# Altium PCB TMP-1-A.PcbDoc
Units mm, origin at the board's own origin, x right, y up, seen from the top; angles counter-clockwise.
Board outline 34 x 25 mm, 2 copper layers (Top Layer, Bottom Layer); 20 components, 9 nets, 43 pads, 18 vias.
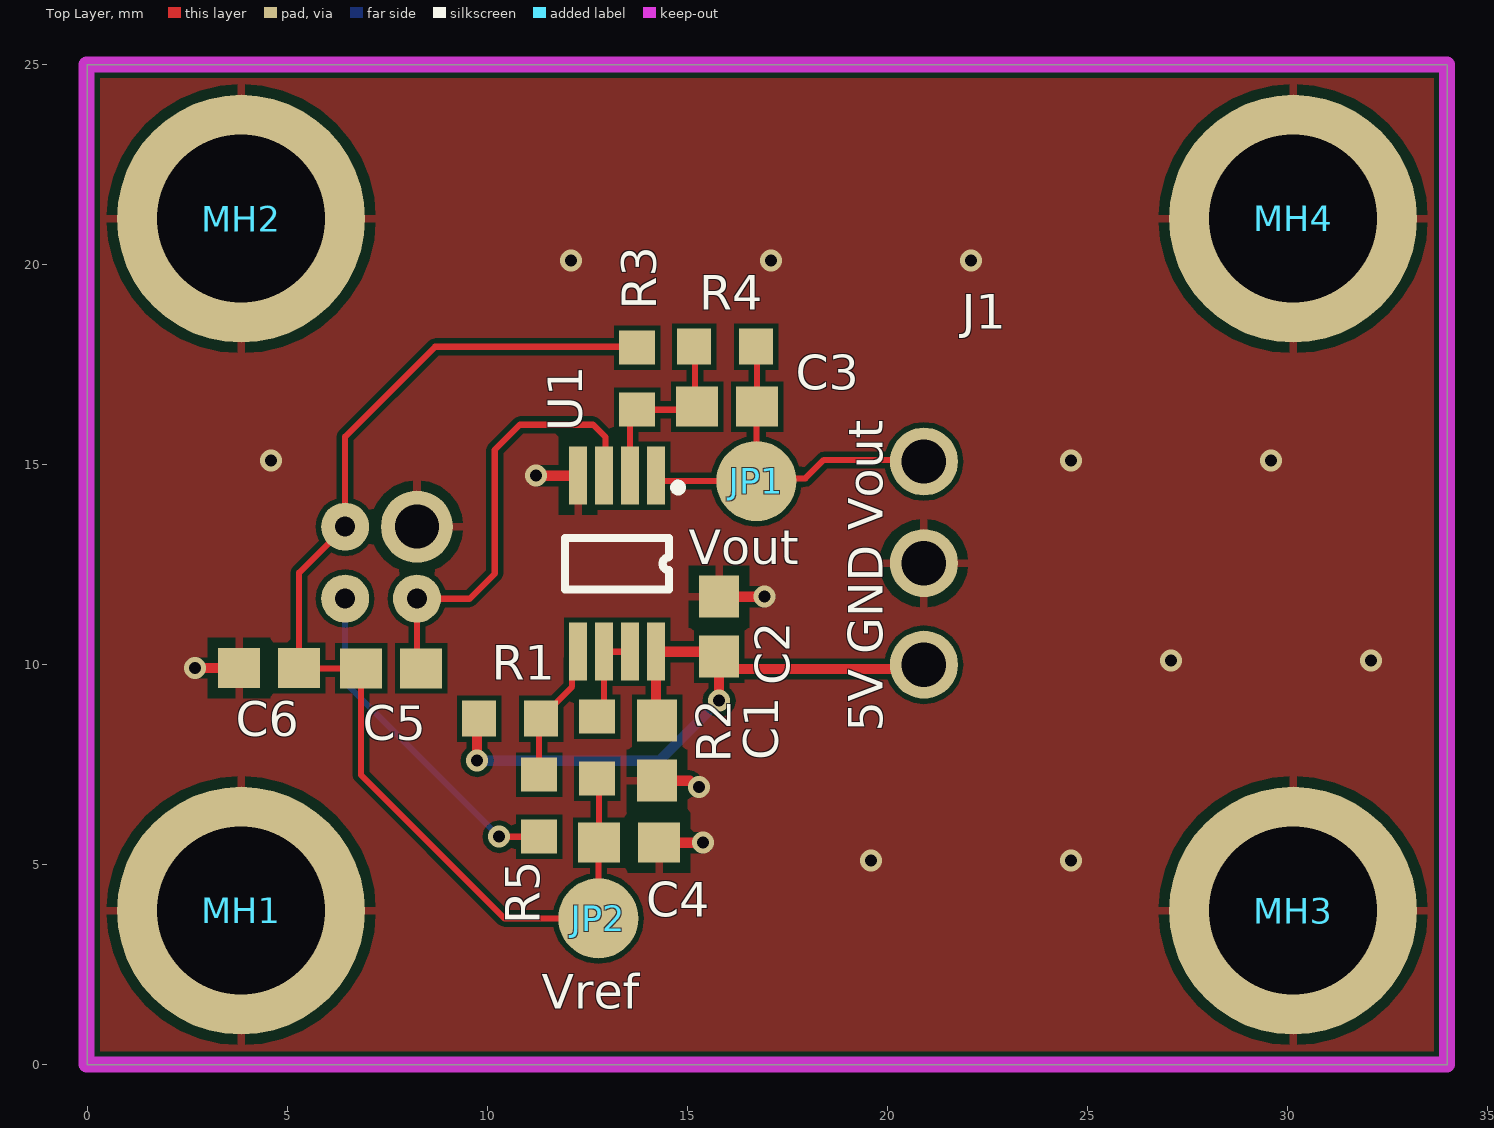
[diagram p0: Top Layer view]
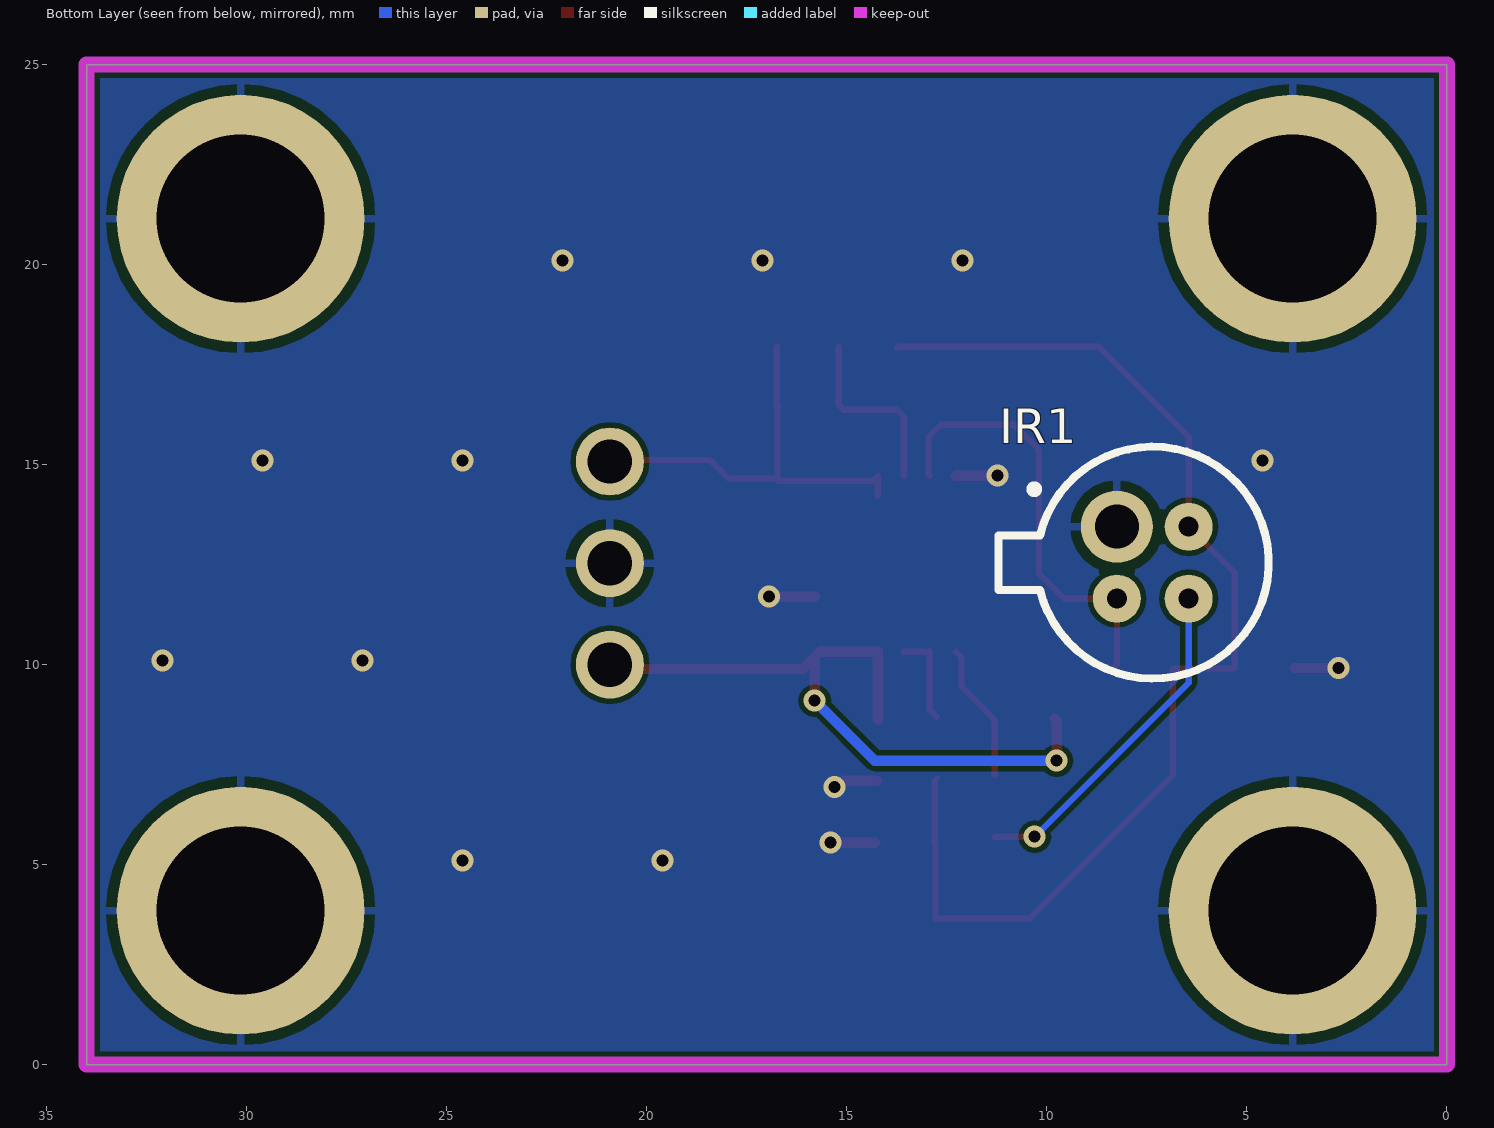
[diagram p1: Bottom Layer view, seen from below]
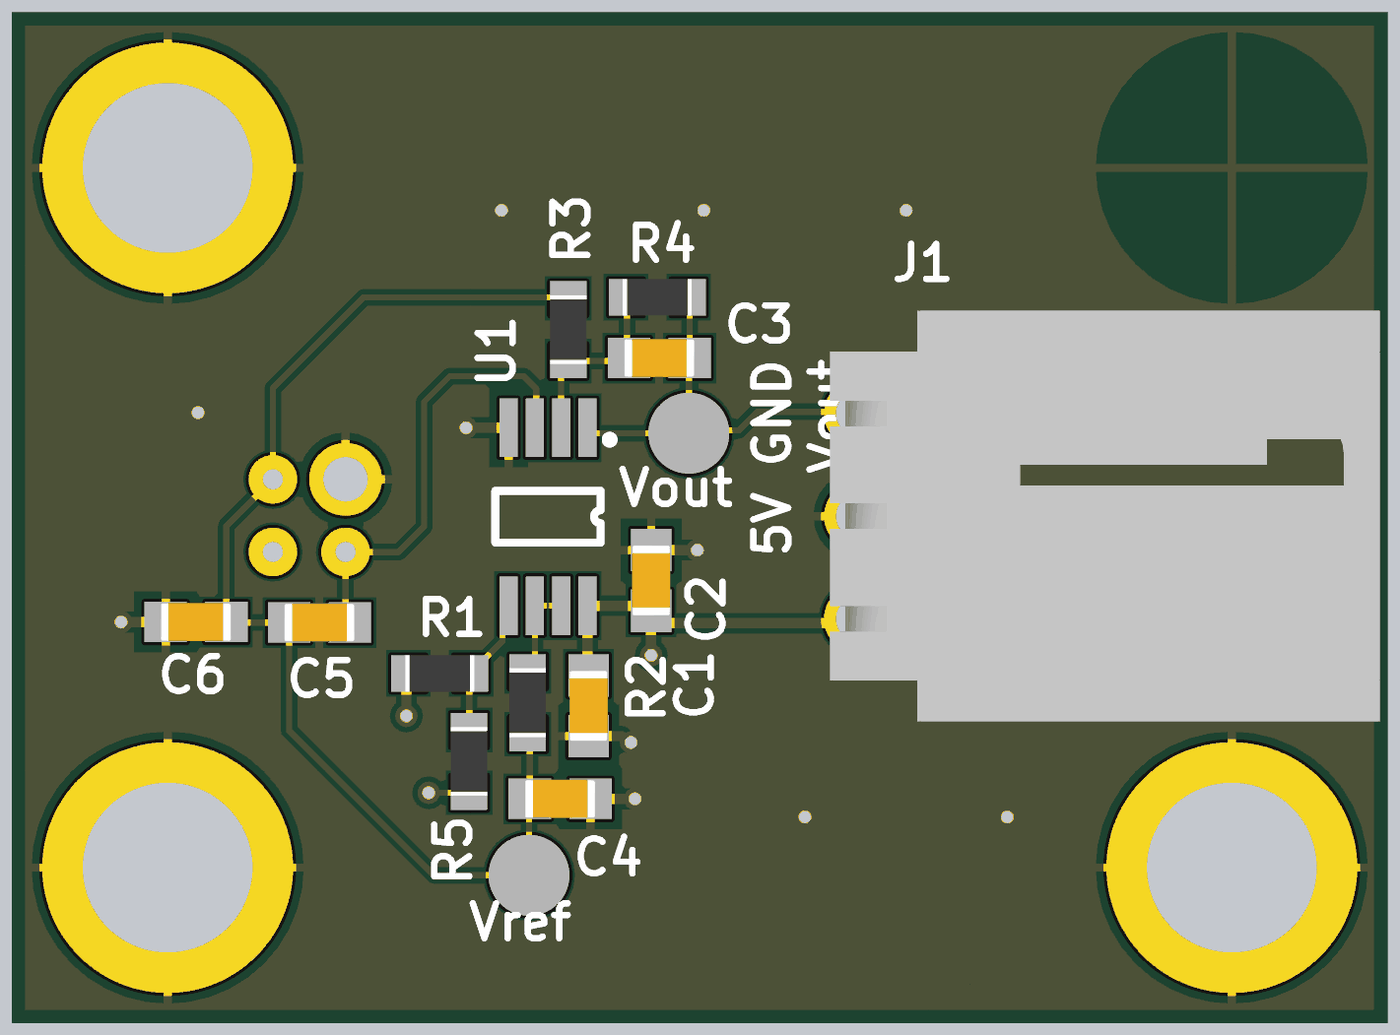
[diagram p2: 3D render of the assembled board from above, using the file's embedded part models]

## Layer stack, top to bottom
Top Solder: solder mask 0.0102, Solder Resist, Dk 3.5
Top Layer: signal copper 0.0356
Dielectric 1: dielectric 0.32, FR-4, Dk 4.8
Bottom Layer: signal copper 0.0356
Bottom Solder: solder mask 0.0102, Solder Resist, Dk 3.5

## Board outline
0,0 34,0 34,25 0,25

## Design rules (kind name [scope] priority, off if disabled: settings)
BoardOutlineClearance [All] p1: gap=0.2 ignorepadtopadclearanceinfootprint=FALSE
Clearance "Stitching HV_GND" [IsStitchingVia and InNet('HV_GND') vs (IsVia and (Not IsStitchingVia)) Or IsPad] p1: gap=0.127 ignorepadtopadclearanceinfootprint=FALSE
Clearance [All] p2: gap=0.127 ignorepadtopadclearanceinfootprint=TRUE except(0.2: Arc-SMDPad Track-SMDPad; 0.25: SMDPad-Hole THPad-Hole Via-Hole Fill-Hole Poly-Hole Region-Hole Text-Hole; 0.254: Arc-Via Arc-Hole Track-Via Track-Hole Via-Via; 0.33: Arc-THPad Track-THPad; 0.5: THPad-THPad; 0.54: SMDPad-THPad)
ComponentClearance [All] p1: gap=0.127 collisioncheckmode=3 verticalgap=0.127 showdistances=TRUE
DiffPairsRouting [All] p1: maxlimit=0.254 minlimit=0.127 mostfreqgap=0.127 toplayer_minwidth=0.127 toplayer_maxwidth=25.4 toplayer_prefwidth=0.127 bottomlayer_minwidth=0.127 bottomlayer_maxwidth=25.4 bottomlayer_prefwidth=0.127 maxuncoupledlength=12.7
Height [All] p1: minheight=0 maxheight=1816.048 prefheight=12.7
HoleSize [All] p1: absolutevalues=TRUE maxlimit=6.3 minlimit=0.3 maxpercent=80.000 minpercent=20.000
HoleToHoleClearance [All] p1: gap=0.25 allowstackedmicrovias=FALSE
MinimumAnnularRing [All] p1: minimumring=0.076
MinimumSolderMaskSliver [All] p1: minsoldermaskwidth=0
PlaneClearance [All] p1: clearance=0.127
PlaneConnect PlaneConnectPowerPads [InPadClass('PowerPads')] p1: planeconnectstyle=Direct reliefexpansion=0.508 reliefentries=4 reliefconductorwidth=0.254 reliefairgap=0.254
PlaneConnect [All] p2: pad.planeconnectstyle=Relief pad.reliefexpansion=0.3 pad.reliefentries=4 pad.reliefconductorwidth=0.254 pad.reliefairgap=0.127 via.planeconnectstyle=Direct via.reliefexpansion=0.3 via.reliefentries=4 via.reliefconductorwidth=0.127 via.reliefairgap=0.127
PolygonConnect PolygonConnectPowerPads [All vs (InPadClass('PowerPads'))] p1: connectstyle=Direct reliefconductorwidth=0.254 reliefentries=4 polygonreliefangle="90 Angle" airgapwidth=0.254
PolygonConnect [All] p2: thpad.connectstyle=Relief thpad.reliefconductorwidth=0.203 thpad.reliefentries=4 thpad.polygonreliefangle="90 Angle" thpad.airgapwidth=0.254 smdpad.connectstyle=Relief smdpad.reliefconductorwidth=0.203 smdpad.reliefentries=4 smdpad.polygonreliefangle="90 Angle" smdpad.airgapwidth=0.254 via.connectstyle=Direct via.reliefconductorwidth=0.203 via.reliefentries=4 via.polygonreliefangle="90 Angle" via.airgapwidth=0.254
RoutingVias [All] p1: holewidth=0.3 width=0.55 viastyle="Through Hole" minholewidth=0.2 minwidth=0.45 maxholewidth=0.6 maxwidth=6.6
SilkToSilkClearance [All] p1: silktosilkclearance=0
SilkToSolderMaskClearance [IsPad] p1: minsilkscreentomaskgap=0 clearancetoexposedcopper=TRUE
SolderMaskExpansion SolderMaskExpansion_Via [IsVia] p1: expansion=0.102 istentingtop=TRUE
SolderMaskExpansion [All] p2: expansion=0.075 istentingtop=FALSE
Width [All] p1: maxlimit=25.4 minlimit=0.13 preferedwidth=0.152 minimp=50.000000 maximp=50.000000 favimp=50.000000
20 further rules are at their usual default settings.

## Components (designator, comment, footprint, x,y, rotation, side; value= is the part's Value field where it differs from the comment)
C1 "0.1uF" CAP-0603 14.25,7.85 r90 top
C2 "1uF" CAP-0603 15.8,10.95 r270 top
C3 "1uF" CAP-0603 16,16.45 r180 top
C4 "0.1uF" CAP-0603 13.55,5.55 r180 top
C5 "1uF" CAP-0603 7.6,9.91 r0 top
C6 "1uF" CAP-0603 4.55,9.92 r0 top
IR1 "ZTP-148SRC1" ZTP-148SRC1 7.348,12.552 r0 bottom
J1 "WM4901-ND" 3PIN 20.92,10 r90 top
JP1 "Testpoint2" TP2 16.73,14.59 r0 top
JP2 "Testpoint2" TP2 12.78,3.66 r0 top
MH1 "MountingHole" MH4.2MM#1 3.85,4.35 r0 top
MH2 "MountingHole" MH4.2MM#2 5.35,20.65 r0 top
MH3 "MountingHole" MH4.2MM#3 30.4,1.46 r0 top
MH4 "MountingHole" MH4.2MM#4 46.09,5.22 r0 top
R1 "750k 1%" RES-0603 10.575,8.65 r180 top
R2 "100R 1%" RES-0603 12.75,7.925 r270 top
R3 "1K" RES-0603 13.75,17.15 r270 top
R4 "100K" RES-0603 15.95,17.95 r0 top
R5 "75k 1%" RES-0603 11.3,6.475 r90 top
U1 "TLV2333IDR" TSSOP65P505X110-8 13.25,12.525 r270 top

## Footprints (in the part's own frame and the unit in brackets; to place one, negate y for a bottom-side part, rotate by r counter-clockwise, add the part's x,y. Pads: shape width x height; smd on the part's side, far side on the other; paste and mask are expansions set on the pad)
3PIN [mm]
  round 1.7 hole 1.11: 1(0,0) 2(2.54,0) 3(5.08,0)
  body extent -2.54,-12.89 7.62,0.7, height 7.06
CAP-0603 [mm] "Chip Capacitor, 2-Leads, Body 1.60x0.80mm, IPC Medium Density"
  rect 1.05x1 smd: 1(-0.75,0) 2(0.75,0)
  body extent -0.87,-0.48 0.87,0.48, height 0.9
MH4.2MM#1 [mm] "Mounting Hole, 4.2mm"
  round 6.2 hole 4.2: 1(0,-0.5)
MH4.2MM#2 [mm] "Mounting Hole, 4.2mm"
  round 6.2 hole 4.2: 1(-1.5,0.5)
MH4.2MM#3 [mm] "Mounting Hole, 4.2mm"
  round 6.2 hole 4.2: 1(-0.25,2.39)
MH4.2MM#4 [mm] "Mounting Hole, 4.2mm"
  round 6.2 hole 4.2: 1(-15.94,15.93)
RES-0603 [mm] "Chip Resistor, 2-Leads, Body 1.60x0.80mm, IPC Medium Density"
  rect 0.85x0.9 smd: 1(-0.775,0) 2(0.775,0)
  body extent -0.85,-0.45 0.85,0.45, height 0.55
TP2 [mm]
  round 2 smd: 1(0,0)
TSSOP65P505X110-8 [mm] "VSSOP, 8-Leads, Body 3.1X3.1mm, Pitch 0.65mm, IPC Medium Density"
  rect 1.45x0.45 smd: 1(-2.2,0.975) 2(-2.2,0.325) 3(-2.2,-0.325) 4(-2.2,-0.975) 5(2.2,-0.975) 6(2.2,-0.325) 7(2.2,0.325) 8(2.2,0.975)
  silkscreen extent -2,-1.3 0.64,1.62, body extent -1.55,-1.55 1.55,1.55, height 0.95
ZTP-148SRC1 [mm] "IR Temperature Sensor"
  round 1.8 hole 1.1: 1(0.898,-0.898)
  round 1.2 hole 0.5: 2(-0.898,-0.898) 3(-0.898,0.898) 4(0.898,0.898)
  silkscreen extent -2.9,-2.9 3.86,2.9, body extent -2.7,-2.7 2.7,2.7, height 2.8

## Part data
C1 C4: library part 0603-0.1uF-16V, "CAP CER 0.1UF 16V X7R 0603", Capacitance=100nF, Case Code (Imperial)=0603, Case Code (Metric)=1608, Dielectric=X7R, Dielectric Material=Ceramic, Manufacturer=KEMET, Manufacturer Part Number=C0603C104M4RACTU, Max Operating Temperature=125°C, Min Operating Temperature=-55°C, Package Quantity=1, Supplier Part Number 1=399-1099-6-ND, Tolerance=20%, Voltage Rating=16V, Case/Package=0603, ComponentLink1Description=https://www.verical.com/server-webapp/html/getDatasheet?partID=66190&src-supplier=Verical, ComponentLink1URL=https://www.verical.com/server-webapp/html/getDatasheet?partID=66190&src-supplier=Verical, ComponentLink2Description=http://www.farnell.com/datasheets/2746055.pdf?src-supplier=Element14, ComponentLink2URL=http://www.farnell.com/datasheets/2746055.pdf?src-supplier=Element14, ComponentLink3Description=http://www.farnell.com/datasheets/2123765.pdf?src-supplier=Element14, ComponentLink3URL=http://www.farnell.com/datasheets/2123765.pdf?src-supplier=Element14, ComponentLink4Description=http://www.alliedelec.com/m/d/9bfe7773041ffe9d406e68bc7b377fdd.pdf?src-supplier=Allied+Electronics, ComponentLink4URL=http://www.alliedelec.com/m/d/9bfe7773041ffe9d406e68bc7b377fdd.pdf?src-supplier=Allied+Electronics, ComponentLink5Description=https://www.verical.com/server-webapp/html/getDatasheet?partID=302288&src-supplier=Verical, ComponentLink5URL=https://www.verical.com/server-webapp/html/getDatasheet?partID=302288&src-supplier=Verical, Depth=0.8mm, Height=0.8mm, Lead Pitch=0.7mm, Length=1.6mm, Mount="Surface Mount,PCB", Number of Pins=2, Packaging="Tape and Reel", Pricing 1="1=0.1, 10=0.036, 100=0.0161, 500=0.01152, 1000=0.00904 (USD)", Radiation Hardening=No, REACH SVHC="No SVHC", Stock 1=254524, Supplier 1=Digi-Key, Termination=SMD/SMT, Thickness=0.034inch, Voltage Rating (DC)=16V, Width=0.031inch
C2 C3 C5 C6: library part 0603-1uF-16V, "CAP CER 1UF 16V X7R 0603", Case Code (Imperial)=0603, Case Code (Metric)=1608, Dielectric=X7R, Dielectric Material=Ceramic, Manufacturer=KEMET, Manufacturer Part Number=C0603C105K4RACTU, Max Operating Temperature=125°C, Min Operating Temperature=-55°C, Package Quantity=4000, Supplier Part Number 1=399-7847-6-ND, Tolerance=10%, Voltage=16V, Capacitance=1uF, Case/Package=0603, ComponentLink1Description=http://www.mouser.com/ds/2/212/KEM_C1002_X7R_SMD-1102033.pdf?src-supplier=Mouser, ComponentLink1URL=http://www.mouser.com/ds/2/212/KEM_C1002_X7R_SMD-1102033.pdf?src-supplier=Mouser, ComponentLink2Description=http://www.kemet.com/kemet/web/homepage/kechome.nsf/file/Commercial%20Ceramic%20Chips%20X7R%20Dielectric/$file/KEM_C1002_X7R_SMD.pdf?src-supplier=Element14, ComponentLink2URL=http://www.kemet.com/kemet/web/homepage/kechome.nsf/file/Commercial%20Ceramic%20Chips%20X7R%20Dielectric/$file/KEM_C1002_X7R_SMD.pdf?src-supplier=Element14, ComponentLink3Description=https://www.verical.com/server-webapp/html/getDatasheet?partID=385479&src-supplier=Verical, ComponentLink3URL=https://www.verical.com/server-webapp/html/getDatasheet?partID=385479&src-supplier=Verical, ComponentLink4Description=http://www.kemet.com/kemet/web/homepage/kechome.nsf/vapubfiles/KEM_C1002_X7R_SMD.pdf/$file/KEM_C1002_X7R_SMD.pdf?src-supplier=Element14, ComponentLink4URL=http://www.kemet.com/kemet/web/homepage/kechome.nsf/vapubfiles/KEM_C1002_X7R_SMD.pdf/$file/KEM_C1002_X7R_SMD.pdf?src-supplier=Element14, Contact Plating=Tin,Matte, Depth=0.8mm, Dissipation Factor=3.5%, Height=0.8mm, Length=1.6mm, Mount="Surface Mount,PCB", Number of Pins=2, Packaging="Tape and Reel", Pricing 1="1=0.12, 10=0.088, 100=0.0391, 500=0.02792, 1000=0.02193 (USD)", Radiation Hardening=No, REACH SVHC="No SVHC", Stock 1=600463, Supplier 1=Digi-Key, Termination=SMD/SMT, Thickness=0.034inch, Voltage Rating=16V, Voltage Rating (DC)=16V, Width=0.031inch
IR1: library part IR_ZTP-148SRC1, "THERMOPILE IR SENSOR with thermistor", Manufacturer=Amphenol, Supplier Part Number 1=45-ZTP-148SRC1-ND, Manufacturer Part Number=ZTP-148SRC1, Pricing 1="1=3.10000, 10=2.80800, 25=2.51560, 50=2.22300, 100=2.16450, 500=1.81350, 1000=1.69650, 5000=1.57950 (USD)", RoHS=No, Stock 1=97895, Supplier 1=Digi-Key
J1: library part 3PIN, "CONN HEADER R/A 3POS 2.54MM", Color=Black, Contact Resistance=30mR, Current Rating=3A, Flammability Rating="UL94 V-0", Insulation Resistance=1GR, Manufacturer=Molex, Manufacturer Part Number=70553-0002, Max Operating Temperature=105°C, Min Operating Temperature=-40°C, Package Quantity=2080, Voltage Rating=250V, Approvals=UL,CSA, ComponentLink1Description=http://www.molex.com/webdocs/datasheets/pdf/en-us/0705530002_PCB_HEADERS.pdf?src-supplier=Avnet, ComponentLink1URL=http://www.molex.com/webdocs/datasheets/pdf/en-us/0705530002_PCB_HEADERS.pdf?src-supplier=Avnet, ComponentLink2Description=http://www.onlinecomponents.com/productFiles/mf-MOL/209530705530002_pcb_headers.pdf?src-supplier=Onlinecomponents.com, ComponentLink2URL=http://www.onlinecomponents.com/productFiles/mf-MOL/209530705530002_pcb_headers.pdf?src-supplier=Onlinecomponents.com, ComponentLink3Description=http://uk.rs-online.com/webdocs/1362/0900766b81362e0f.pdf?src-supplier=RSComponents, ComponentLink3URL=http://uk.rs-online.com/webdocs/1362/0900766b81362e0f.pdf?src-supplier=RSComponents, ComponentLink4Description=http://www.jameco.com/Jameco/Products/ProdDS/1933671.pdf?src-supplier=Jameco, ComponentLink4URL=http://www.jameco.com/Jameco/Products/ProdDS/1933671.pdf?src-supplier=Jameco, ComponentLink5Description=http://www.mouser.com/ds/2/276/0705530002_PCB_HEADERS-172778.pdf?src-supplier=Mouser, ComponentLink5URL=http://www.mouser.com/ds/2/276/0705530002_PCB_HEADERS-172778.pdf?src-supplier=Mouser, Contact Gender=Male, Contact Material="Bronze,Brass,Copper Alloy", Contact Plating=Gold, ELV=Compliant, Gender=Male, Glow Wire Compliant=Non-compliant, Housing Color=Black, Housing Material=Thermoplastic, Lead Free="Lead Free", Material=Brass, Mount="Through Hole", Number of Circuits=3, Number of Contacts=3, Number of Positions=3, Number of Rows=1, Orientation="Right Angle", Packaging=Rail/Tube, Pitch=2.54mm, Pricing 1="1=1.02, 10=0.893, 100=0.7702, 500=0.63018, 1000=0.56016, 5000=0.49014, 10000=0.46563 (USD)", Radiation Hardening=No, REACH SVHC=Unknown, Stock 1=2903, Supplier 1=Digi-Key, Supplier Part Number 1=WM4901-ND, Termination=Solder, Voltage Rating (DC)=250V
JP1 JP2: "Single layer pad TP"
MH1 MH2 MH3 MH4: library part MH4.2mm, "Mounting hole, 4.2mm", Case=TH
R1: library part 0603-750K, "RES SMD 750K OHM 1% 1/10W 0603", Case Code (Imperial)=0603, Case Code (Metric)=1608, Manufacturer="Stackpole Electronics", Manufacturer Part Number=RMCF0603FT750K, Max Operating Temperature=155°C, Max Power Dissipation=100mW, Min Operating Temperature=-55°C, Resistance=750kR, Resistor Type="Thick Film", Supplier Part Number 1=RMCF0603FT750KCT-ND, Temperature Coefficient=100ppm/°C, Tolerance=1%, Case/Package=0603, Category="Chip SMD Resistors", ComponentLink1Description=http://components.arrow.com/part/dataview/44988031S7440371N1174?src-supplier=Arrow+Electronics, ComponentLink1URL=http://components.arrow.com/part/dataview/44988031S7440371N1174?src-supplier=Arrow+Electronics, ComponentLink2Description=https://www.seielect.com/Catalog/SEI-RMCF_RMCP.pdf?src-supplier=Digi-Key, ComponentLink2URL=https://www.seielect.com/Catalog/SEI-RMCF_RMCP.pdf?src-supplier=Digi-Key, ComponentLink3Description=https://www.seielect.com/catalog/SEI-Packaging.pdf?src-supplier=Digi-Key, ComponentLink3URL=https://www.seielect.com/catalog/SEI-Packaging.pdf?src-supplier=Digi-Key, ComponentLink4Description=http://www.seielect.com/Catalog/SEI-RMC.pdf?src-supplier=Future+Electronics, ComponentLink4URL=http://www.seielect.com/Catalog/SEI-RMC.pdf?src-supplier=Future+Electronics, ComponentLink5Description=https://www.seielect.com/catalog/SEI-RMCF_RMCP.pdf?src-supplier=Avnet, ComponentLink5URL=https://www.seielect.com/catalog/SEI-RMCF_RMCP.pdf?src-supplier=Avnet, Contact Plating=Tin,Matte, Features="Automotive AEC-Q200", Height=0.022inch, Lead Free="Lead Free", Length=0.061inch, Manufacturer Product Number=RMCF0603FT750K, Mount="Surface Mount", Number of Terminations=2, Packaging="Tape and Reel", Power Rating=100mW, Pricing 1="1=0.10000, 10=0.01600, 100=0.00650, 1000=0.00292, 2500=0.00253 (USD)", Radiation Hardening=No, RoHS=Yes, RoHS Compliant=Yes, Series=RMCF, Size Code=0603, Stock 1=145363, Supplier 1=Digi-Key, Width=0.031inch
R2: library part 0603-100R, "RES 100 OHM 1% 1/8W 0603", Case Code (Imperial)=0603, Case Code (Metric)=1608, Manufacturer="Stackpole Electronics", Manufacturer Part Number=RNCP0603FTD100R, Max Operating Temperature=155°C, Max Power Dissipation=125mW, Min Operating Temperature=-55°C, Resistance=100R, Resistor Type="Thin Film", Supplier Part Number 1=RNCP0603FTD100RCT-ND, Temperature Coefficient=100ppm/°C, Tolerance=1%, Case/Package=0603, Category="Chip SMD Resistors", ComponentLink1Description=https://www.seielect.com/catalog/SEI-Packaging.pdf?src-supplier=Digi-Key, ComponentLink1URL=https://www.seielect.com/catalog/SEI-Packaging.pdf?src-supplier=Digi-Key, ComponentLink2Description=https://www.seielect.com/Catalog/SEI-rncp.pdf?src-supplier=Avnet, ComponentLink2URL=https://www.seielect.com/Catalog/SEI-rncp.pdf?src-supplier=Avnet, Contact Plating=Tin,Matte, Features="Moisture Resistant,Anti-Sulfur", Height=0.02inch, Lead Free="Lead Free", Length=0.059inch, Manufacturer Product Number=RNCP0603FTD100R, Mount="Surface Mount", Number of Terminations=2, Packaging="Tape and Reel", Pricing 1="1=0.10000, 10=0.05800, 100=0.02360, 1000=0.01060, 2500=0.00920 (USD)", Radiation Hardening=No, RoHS=Yes, RoHS Compliant=Yes, Series=RNCP, Stock 1=158067, Supplier 1=Digi-Key, Width=0.031inch
R3: library part 0603-1KR, "RES SMD 1K OHM 1% 1/10W 0603", Case Code (Imperial)=0603, Case Code (Metric)=1608, Manufacturer="Vishay Dale", Manufacturer Part Number=CRCW06031K00FKEA, Max Operating Temperature=155°C, Max Power Dissipation=100mW, Min Operating Temperature=-55°C, Package Quantity=10, Resistance=1kR, Supplier Part Number 1=541-1.00KHCT-ND, Temperature Coefficient=100ppm/°C, Tolerance=1%, Voltage Rating=75V, Case/Package=0603, ComponentLink1Description=http://www.vishay.com/docs/20035/dcrcwe3.pdf?src-supplier=Digi-Key, ComponentLink1URL=http://www.vishay.com/docs/20035/dcrcwe3.pdf?src-supplier=Digi-Key, ComponentLink2Description=http://uk.rs-online.com/webdocs/0d98/0900766b80d98afc.pdf?src-supplier=RSComponents, ComponentLink2URL=http://uk.rs-online.com/webdocs/0d98/0900766b80d98afc.pdf?src-supplier=RSComponents, ComponentLink3Description=http://www.vishay.com/docs/20035/dcrcwe3.pdf?src-supplier=Avnet, ComponentLink3URL=http://www.vishay.com/docs/20035/dcrcwe3.pdf?src-supplier=Avnet, ComponentLink4Description=http://www.vishay.com/docs/20035/dcrcwe3.pdf?src-supplier=Avnet+Asia, ComponentLink4URL=http://www.vishay.com/docs/20035/dcrcwe3.pdf?src-supplier=Avnet+Asia, ComponentLink5Description=http://www.farnell.com/datasheets/2310790.pdf?src-supplier=Element14, ComponentLink5URL=http://www.farnell.com/datasheets/2310790.pdf?src-supplier=Element14, ComponentLink6Description=https://www.distrelec.biz/Web/Downloads/a_/en/flD-CRCW-e3_data_en.pdf?mime=application%2Fpdf&src-supplier=Distrelec, ComponentLink6URL=https://www.distrelec.biz/Web/Downloads/a_/en/flD-CRCW-e3_data_en.pdf?mime=application%2Fpdf&src-supplier=Distrelec, ComponentLink7Description=http://www.vishay.com/docs/20035/dcrcwe3.pdf?src-supplier=Future+Electronics, ComponentLink7URL=http://www.vishay.com/docs/20035/dcrcwe3.pdf?src-supplier=Future+Electronics, ComponentLink8Description=http://www.vishay.com/docs/20035/dcrcwe3.pdf?src-supplier=Avnet+Europe, ComponentLink8URL=http://www.vishay.com/docs/20035/dcrcwe3.pdf?src-supplier=Avnet+Europe, Composition="Thick Film", Contact Plating=Tin, Depth=0.85mm, Features="Automotive AEC-Q200", Height=0.45mm, Lead Free="Lead Free", Length=1.55mm, Military Standard=Not, Mount="Surface Mount", Number of Pins=2, Number of Terminations=2, Packaging="Tape and Reel", Power Rating=100mW, Pricing 1="1=0.1, 10=0.034, 100=0.0139, 1000=0.00623, 2500=0.0054 (USD)", Radiation Hardening=No, REACH SVHC=Unknown, Stock 1=671453, Supplier 1=Digi-Key, Termination=SMD/SMT, Voltage Rating (DC)=75V, Weight=7.1E-05oz, Width=0.033inch
R4: library part 0603-100KR, "RES 100K OHM 1% 1/10W 0603", Case Code (Imperial)=0603, Case Code (Metric)=1608, Manufacturer="Stackpole Electronics", Manufacturer Part Number=RMCF0603FT100K, Max Operating Temperature=155°C, Max Power Dissipation=100mW, Min Operating Temperature=-55°C, Resistance=100kR, Supplier Part Number 1=RMCF0603FT100KDKR-ND, Temperature Coefficient=100ppm/°C, Tolerance=1%, Working Voltage=75V, Case/Package=0603, ComponentLink1Description=https://www.verical.com/server-webapp/html/getDatasheet?partID=362597&src-supplier=Verical, ComponentLink1URL=https://www.verical.com/server-webapp/html/getDatasheet?partID=362597&src-supplier=Verical, Composition="Thick Film", Contact Plating=Tin,Matte, Depth=0.8mm, Features="Automotive AEC-Q200", Height=0.022inch, Lead Free="Lead Free", Length=1.55mm, Military Standard=Not, Mount="Surface Mount", Number of Terminations=2, Packaging="Tape and Reel", Power Rating=100mW, Pricing 1="1=0.1, 10=0.016, 100=0.0065, 1000=0.00292, 2500=0.00253 (USD)", Radiation Hardening=No, Stock 1=1428218, Supplier 1=Digi-Key, Width=0.031inch
R5: library part 0603-75K, "75 kohm, 75 V, 0603 [1608 Metric], 100 mW,  1%", Case Code (Imperial)=0603, Case Code (Metric)=1608, Manufacturer="Vishay BCcomponents", Manufacturer Part Number=MCT06030C7502FP500, Max Operating Temperature=125°C, Max Power Dissipation=125mW, Min Operating Temperature=-55°C, Package Quantity=5000, Power Rating=100mW, Resistance=75kR, Resistance Tolerance=1%, Resistor Type="Thin Film", Supplier Part Number 1=749-1681-1-ND, Temperature Coefficient=50ppm/°C, Voltage Rating=75V, Case/Package=0603, Category="Chip SMD Resistors", ComponentLink1Description=https://datasheet.ciiva.com/2571/mc-pro-2571677.pdf?src-supplier=Digi-Key, ComponentLink1URL=https://datasheet.ciiva.com/2571/mc-pro-2571677.pdf?src-supplier=Digi-Key, ComponentLink2Description=https://datasheet.ciiva.com/16854/mc-pro-16854780.pdf?src-supplier=Avnet+Europe, ComponentLink2URL=https://datasheet.ciiva.com/16854/mc-pro-16854780.pdf?src-supplier=Avnet+Europe, Construction=Rectangular, Contact Plating=Tin, Depth=0.85mm, Height=0.022inch, Lead Free="Lead Free", Length=0.061inch, Manufacturer Product Number=MCT06030C7502FP500, Military Standard=Not, Mount="Surface Mount", Number of Terminations=2, Packaging="Tape and Reel", Pricing 1="1=0.13000, 10=0.12100, 100=0.04650, 1000=0.02046, 2500=0.01767 (USD)", Radiation Hardening=No, REACH SVHC=Unknown, RoHS=Yes, RoHS Compliant=Yes, Series="MCT 0603 - Professional", Stock 1=36307, Supplier 1=Digi-Key, Tolerance=1%, Voltage Rating (DC)=75V, Width=0.033inch
U1: library part IC_TLV2333, "IC OP AMP ZERO-DRIFT CMOS 8SOIC", Case/Package=SOIC, Input Bias Current=70pA, Input Offset Voltage (Vos)=2uV, Manufacturer="Texas Instruments", Max Operating Temperature=125°C, Min Operating Temperature=-40°C, Operating Supply Current=17uA, Output Current per Channel=5mA, Supplier Part Number 1=296-43772-1-ND, Category="Amplifiers - Op Amps, Buffer, Instrumentation", ComponentLink1Description=http://www.ti.com/lit/ds/symlink/tlv2333.pdf?src-supplier=Digi-Key, ComponentLink1URL=http://www.ti.com/lit/ds/symlink/tlv2333.pdf?src-supplier=Digi-Key, ComponentLink2Description=http://www.ti.com/lit/gpn/tlv2333?src-supplier=Mouser, ComponentLink2URL=http://www.ti.com/lit/gpn/tlv2333?src-supplier=Mouser, Gain Bandwidth Product=350kHz, Lead Free="Lead Free", Manufacturer Part Number=TLV2333IDR, Mount="Surface Mount", Number of Channels=2, Number of Circuits=2, Number of Pins=8, Packaging="Tape and Reel", Pricing 1="1=1.90000, 10=1.70500, 25=1.60840, 100=1.28680, 250=1.12600, 500=1.09382, 1000=0.86862 (USD)", RoHS=Yes, RoHS Compliant=Yes, Slew Rate=0.16V/µs, Stock 1=6297, Supplier 1=Digi-Key

## Via types
v1: diameter 0.55, hole 0.3, Top Layer to Bottom Layer, tented both sides, 18 vias

## Nets (pads, with @x,y where several pads share a name; then routed paths per layer and width w, separated by ;. In a path a pad name is that pad's centre, name@x,y a point inside that pad or via, vN(x,y) a via of type N, cw(c..) or ccw(c..) an arc to the next point about the centre after c; other vN are vias at no path point)
Buf_Out: R2.1 U1.6 U1.7 | length 2.3
  Top Layer w0.152: R2.1 12.925,8.875 U1.6 U1.7
D+5V: C1.2 C2.2 J1.1 R1.2 U1.8 | length 17.5
  Top Layer w0.152: C1.2@14.225,8.625 C1.2
  Top Layer w0.254: v1(9.75,7.6) 9.75,8.6 R1.2 ; C1.2@14.225,8.625 U1.8 15.675,10.325 C2.2 ; v1(15.8,9.1) C2.2 ; J1.1 20.81,9.89 16.11,9.89 C2.2
  Bottom Layer w0.254: v1(9.75,7.6) 14.3,7.6 v1(15.8,9.1)
GND: C1.1 C2.1 C4.1 C6.1 IR1.1 J1.2 MH1.1 MH2.1 MH3.1 MH4.1 U1.4 | length 5.5
  Top Layer w0.254: v1(2.7,9.92) C6.1 ; v1(11.225,14.725) U1.4 ; C1.1 15.064,7.1 15.22,6.944 v1(15.3,6.944) ; C4.1 v1(15.4,5.55) ; C2.1 v1(16.94,11.7)
  other v1: 19.6,5.1 24.6,5.1 27.1,10.1 32.1,10.1 4.6,15.1 24.6,15.1 29.6,15.1 12.1,20.1 17.1,20.1 22.1,20.1
NetC3_2: C3.2 R3.2 R4.1 U1.2 | length 4.7
  Top Layer w0.152: U1.2 13.575,16.2 R3.2 15.075,16.375 15.2,16.5 R4.1@15.2,17.95
NetIR1_3: IR1.3 R5.1 | length 8.5
  Top Layer w0.152: v1(10.3,5.7) R5.1
  Bottom Layer w0.152: IR1.3 6.45,9.55 v1(10.3,5.7)
NetR1_1: R1.1 R5.2 U1.5 | length 3.5
  Top Layer w0.152: R5.2 11.3,8.6 R1.1 11.35,8.675 12.126,9.451 12.126,10.176 U1.5
Vout: C3.1 J1.3 JP1.1 R4.2 U1.1 | length 10.9
  Top Layer w0.152: U1.1@14.225,14.225 U1.1 14.36,14.59 JP1.1 ; R4.2@16.75,17.95 C3.1 16.725,16.45 16.73,16.445 JP1.1 ; J1.3 20.88,15.12 18.42,15.12 17.959,14.659 16.799,14.659 JP1.1
Vref: C4.2 C5.1 C6.2 IR1.2 JP2.1 R2.2 R3.1 | length 29.7
  Top Layer w0.152: R2.2 12.8,7.1 C4.2 12.78,5.53 JP2.1 10.43,3.66 6.85,7.24 C5.1 5.31,9.91 C6.2 5.3,12.3 IR1.2 6.45,15.7 8.7,17.95 13.725,17.95 R3.1
Vtp: C5.2 IR1.4 U1.3 | length 11.2
  Top Layer w0.152: C5.2 8.246,10.014 IR1.4 8.25,11.65 9.56,11.65 10.19,12.28 10.19,15.37 10.82,16 12.65,16 12.955,15.695 12.955,14.755 U1.3

## Polygon pours and split planes (outlines as drawn)
GND on Top Layer "NONET_L-01_P-001" (solid, remove dead copper, pour order 0): 0,0 34,0 34,25 0,25
GND on Bottom Layer "NONET_L-01_P-001" (solid, remove dead copper, pour order 1): 0,25 34,25 34,0 0,0

## Keep-outs
Keep-Out Layer:
  the board outline again, w0.4

## Silkscreen, mask and mechanical layers (free items; w line width, h text height)
Top Overlay:
  text "Vout" at 15.045,12.51 h0.86
  text "5V GND Vout" at 19.89,8.329 h0.86 r90
  text "Vref" at 11.372,1.4 h0.86
BOARD_OUTLINE:
  the board outline again, w0.254

## Dimensions
0,25 to 0,0 on Drill Guide
0,25 to 34,25 on Drill Guide